# Altium PCB PCB1.PcbDoc
Units mm, origin at the board's own origin, x right, y up, seen from the top; angles counter-clockwise.
Board outline 87.5 x 90 mm, 2 copper layers (Top Layer, Bottom Layer); 23 components, 34 nets, 113 pads, 2 vias.
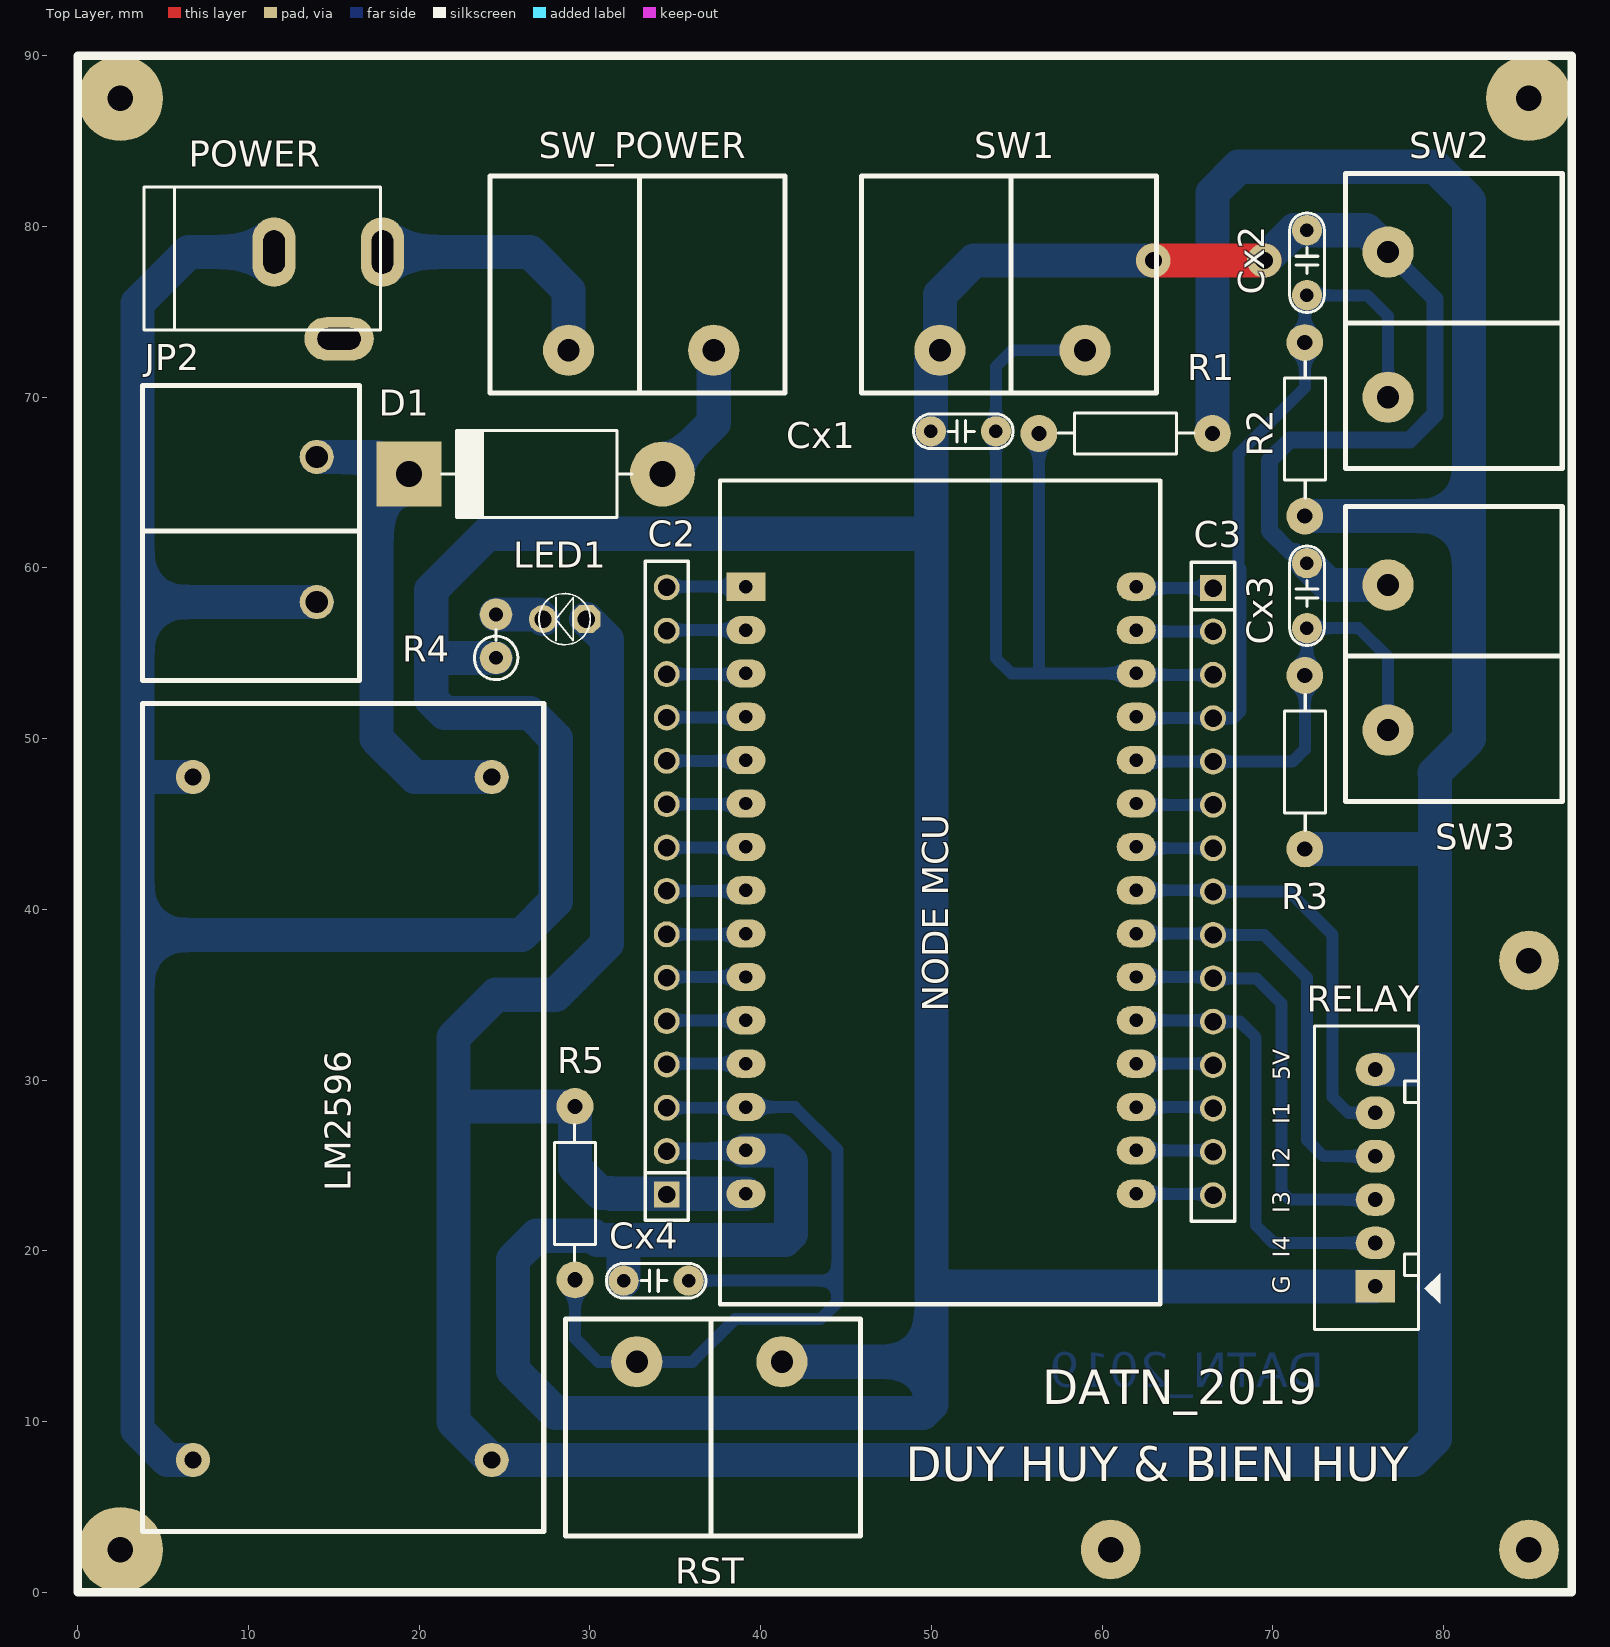
[diagram p0: Top Layer view]
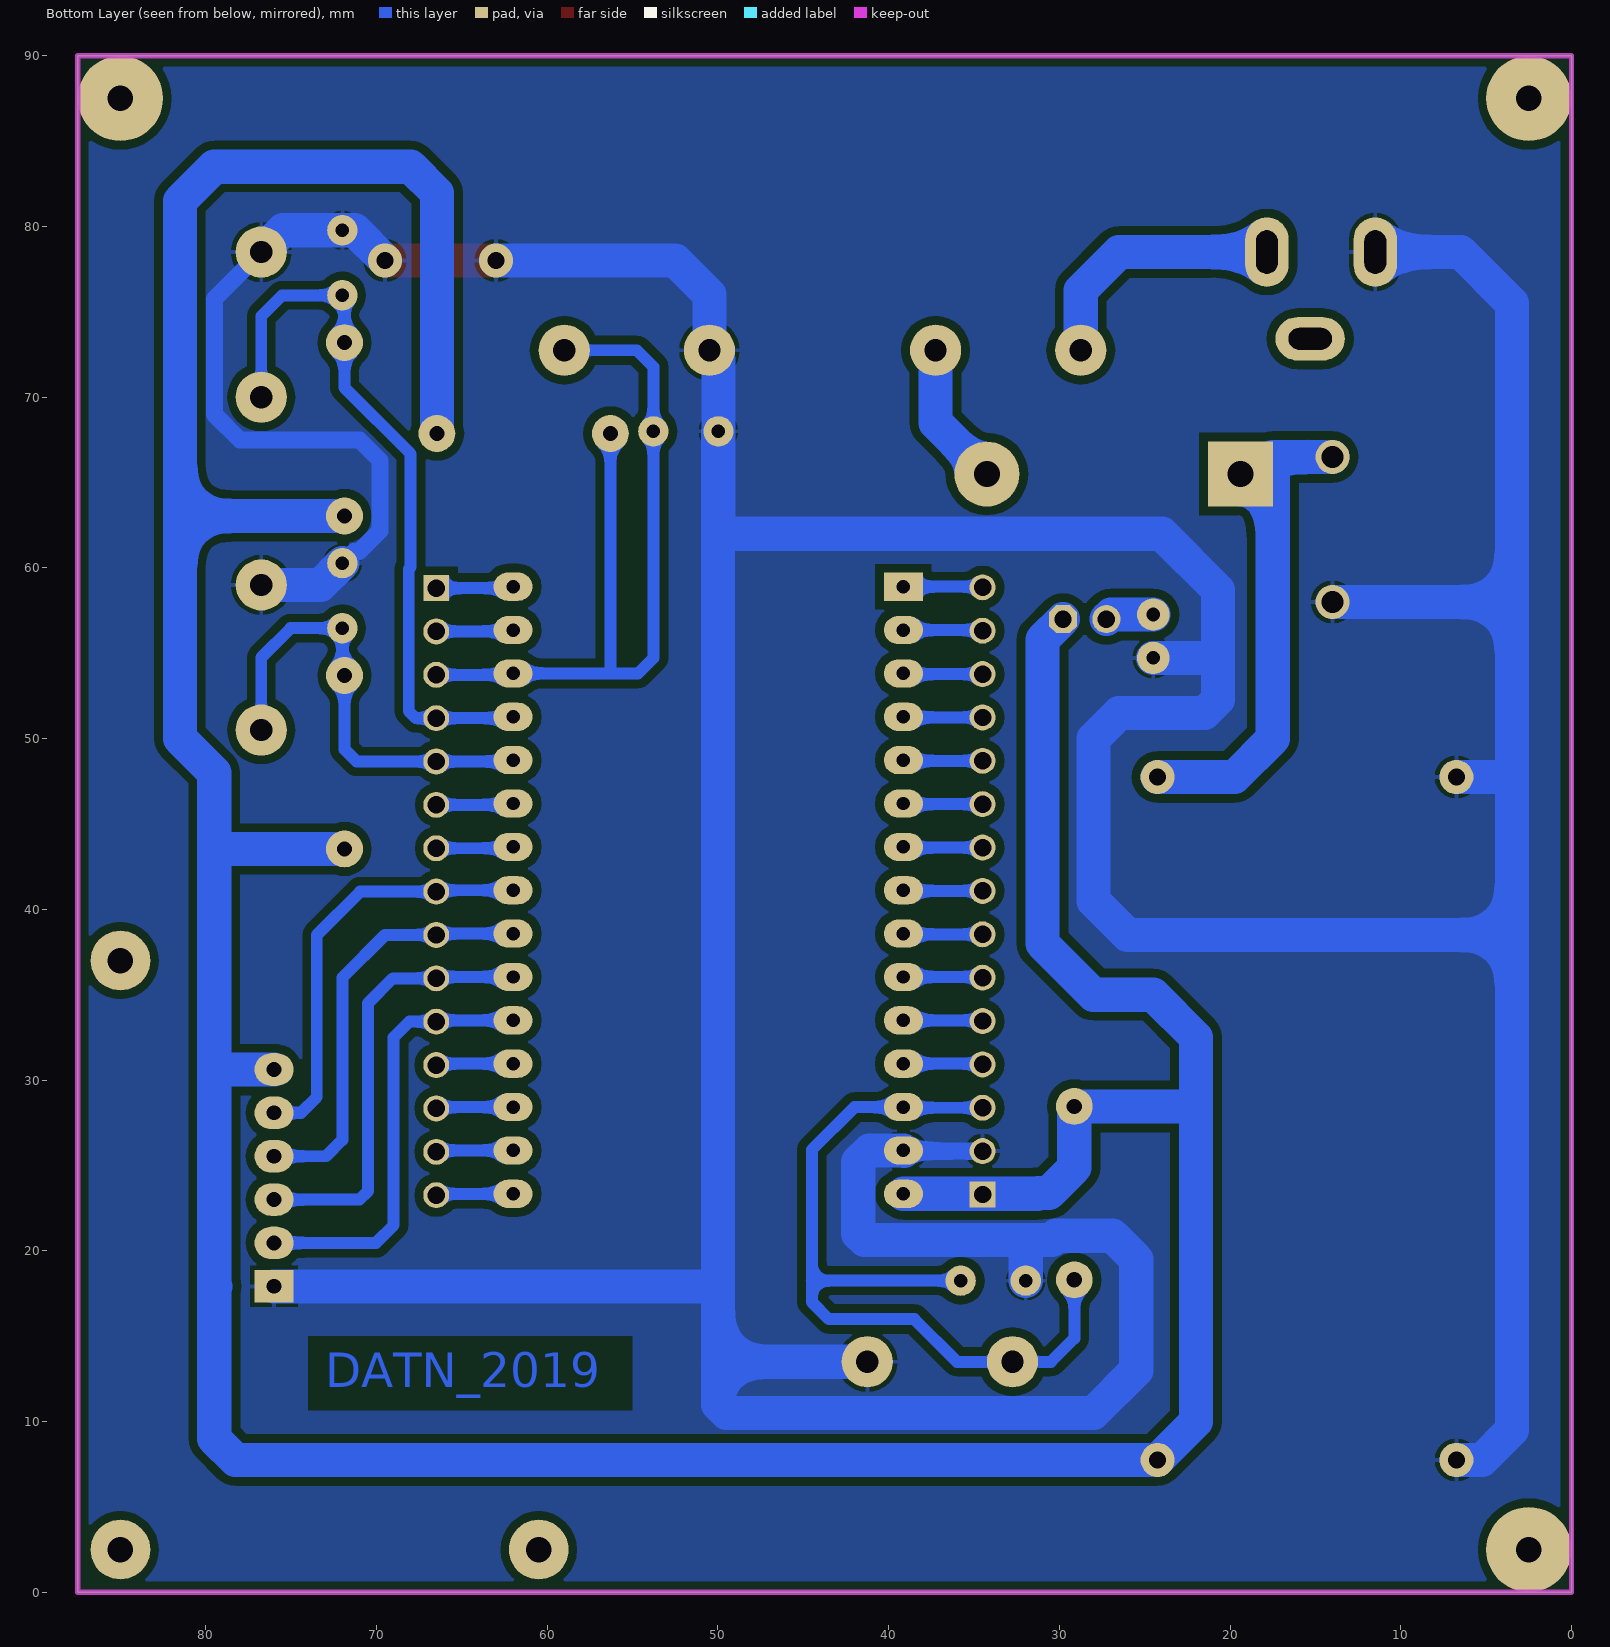
[diagram p1: Bottom Layer view, seen from below]
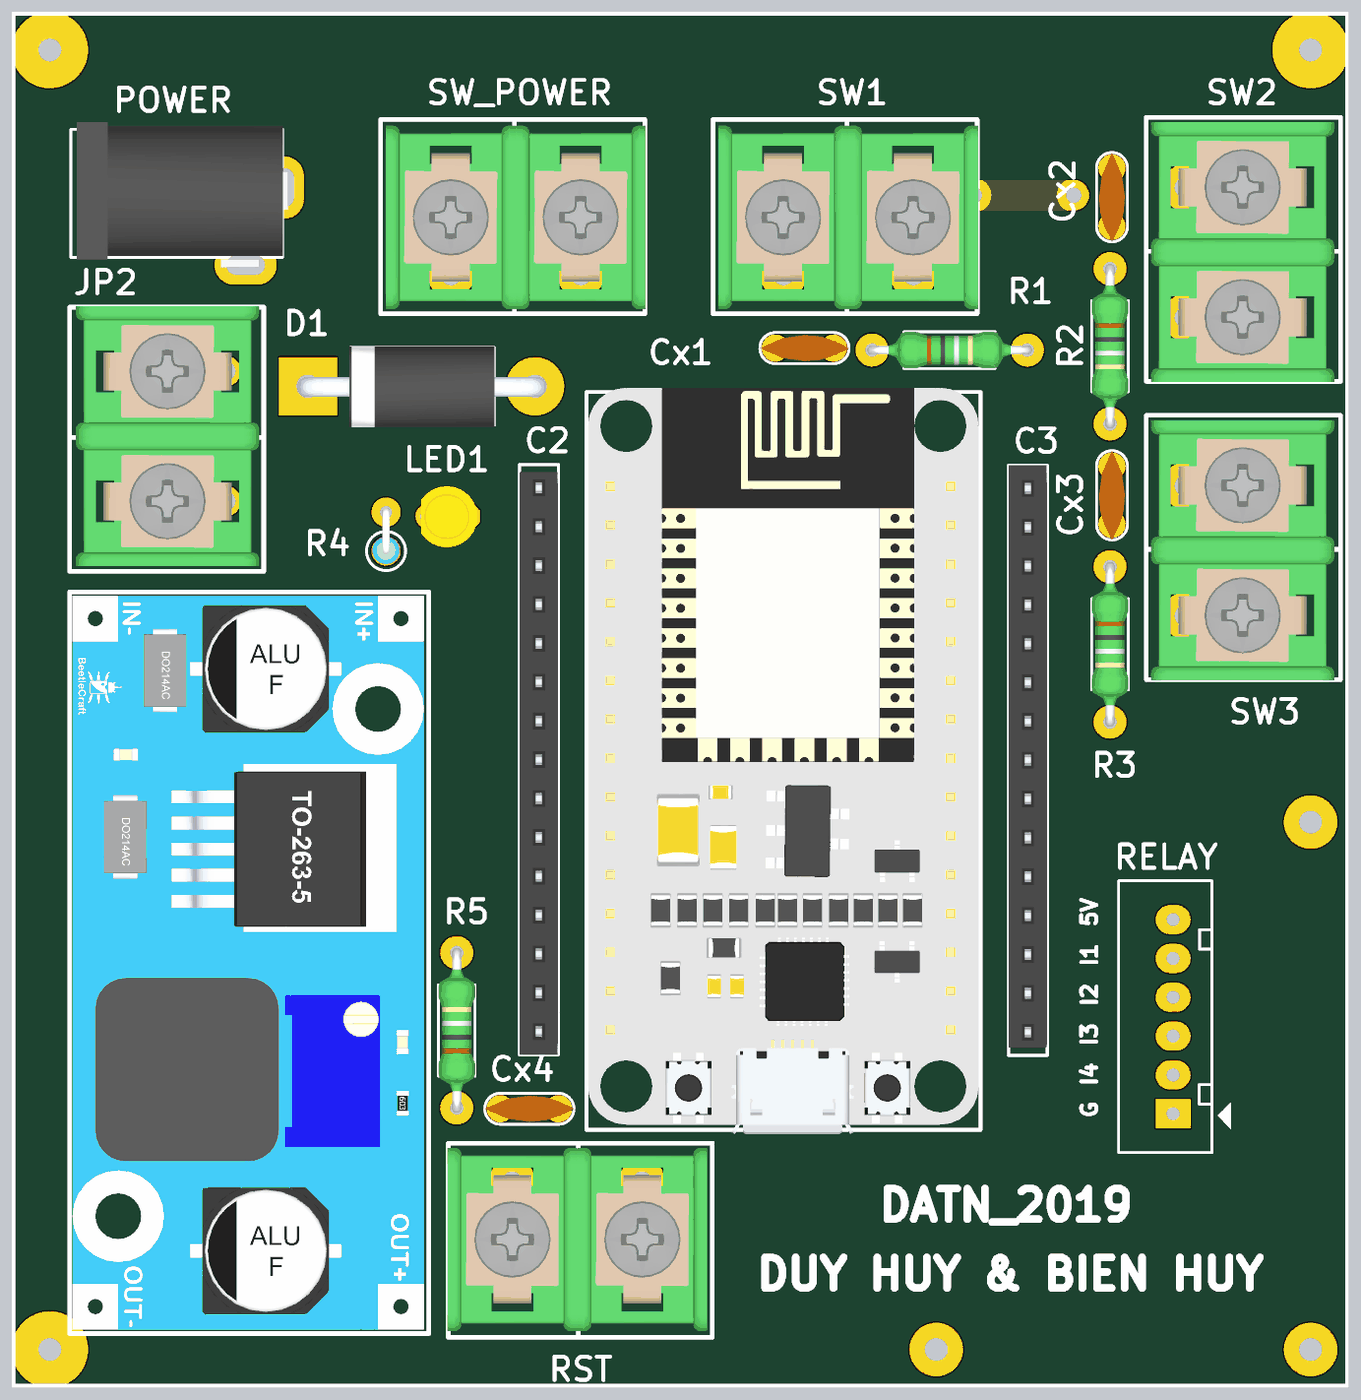
[diagram p2: 3D render of the assembled board from above, using the file's embedded part models]

## Layer stack, top to bottom
Top Solder: solder mask 0.0102, Solder Resist, Dk 3.5
Top Layer: signal copper 0.0356
Dielectric 1: dielectric 0.32, FR-4, Dk 4.8
Bottom Layer: signal copper 0.0356
Bottom Solder: solder mask 0.0102, Solder Resist, Dk 3.5

## Board outline
0,0 87.5,0 87.5,90 0,90

## Design rules (kind name [scope] priority, off if disabled: settings)
Clearance [All] p1: gap=0.5
PolygonConnect [All] p1: connectstyle=Relief reliefconductorwidth=0.254 reliefentries=4 polygonreliefangle="90 Angle" airgapwidth=0.254
RoutingVias [All] p1: holewidth=1 width=2 viastyle="Through Hole" minholewidth=1 minwidth=2 maxholewidth=1 maxwidth=2
SolderMaskExpansion [All] p1: expansion=0.102
Width Net_Signal [InNetClass('Net_Signal')] p1: maxlimit=0.8 minlimit=0.5 preferedwidth=0.7
Width Net_Power [InNetClass('Net_Power')] p2: maxlimit=3 minlimit=1 preferedwidth=2
30 further rules are at their usual default settings.

## Classes and differential pairs
net class Net_Power: 5V 24V GND NetD1_1 NetJDC1_1 NetLED1_2
net class Net_Signal: BUTTON1 BUTTON2 BUTTON3 INT1 INT2 INT3 INT4 NetC2_4 NetC2_5 NetC2_6 NetC2_7 NetC2_8 NetC2_9 NetC2_10 NetC2_11 NetC2_12 NetC2_13 NetC2_14 NetC2_15 NetC3_1 NetC3_2 NetC3_6 NetC3_7 NetC3_12 NetC3_13 NetC3_14 NetC3_15 RST

## Components (designator, comment, footprint, x,y, rotation, side; value= is the part's Value field where it differs from the comment)
C2 "JP15" JP15-C1T 34.5,23.3 r90 top
C3 "JP15" JP15-C1T 66.5,58.82 r270 top
Cx1 "XXpF" CN1.5 51.75,68 r0 top
Cx2 "XXpF" CN1.5 72,78 r270 top
Cx3 "XXpF" CN1.5 72,58.5 r270 top
Cx4 "XXpF" CN1.5 33.75,18.25 r0 top
D1 "Diode" DIO-5A 20.026,65.5 r0 top
JP2 "Header-2P" Header-2P#1 14,62.25 r90 top
LED1 "LED" LED-3MM-YELLOW 29.79,57 r180 top
LM2596 "LM2596" LM2596 15.5,27.75 r270 top (schematic designator IC1)
"NODE MCU" "NodeMCU ESP8266" "NodeMCU ESP8266" 39.14,58.9 r0 top (schematic designator M1)
POWER "Power" DC0 14.675,75.96 r0 top (schematic designator JDC1)
R1 "Res" RES-1/4W 61,68 r180 top
R2 "Res" RES-1/4W 72,68.5 r90 top
R3 "Res" RES-1/4W 72,49 r90 top
R4 "Res" RES-1/8WD 24.5,56 r90 top
R5 "Res" RES-1/4W 29,23 r270 top
RELAY "Modul Relay" Header6 76,17.92 r90 top (schematic designator C1)
RST "Header-2P" Header-2P#2 37,13.5 r180 top (schematic designator JP6)
SW1 "Header-2P" Header-2P#2 54.75,72.75 r0 top (schematic designator JP3)
SW2 "Header-2P" Header-2P#2 76.75,74.25 r270 top (schematic designator JP4)
SW3 "Header-2P" Header-2P#2 76.75,54.75 r270 top (schematic designator JP5)
SW_POWER "Header-2P" Header-2P#2 33,72.75 r0 top (schematic designator JP1)

## Footprints (in the part's own frame and the unit in brackets; to place one, negate y for a bottom-side part, rotate by r counter-clockwise, add the part's x,y. Pads: shape width x height; smd on the part's side, far side on the other; paste and mask are expansions set on the pad)
CN1.5 [mil]
  round 70 hole 31: 1(-70,0) 2(80,0)
  silkscreen extent -110,-40 120,40, body extent -110,-33 120,33, height 235
DC0 [mil] "Jac DC input"
  oval 100x160 hole 50 slot 100 at 90 deg: 1(125,100) 2(-125,100)
  oval 160x100 hole 50 slot 100 at 0 deg: 3(25,-100)
  silkscreen extent -425,-80 120,250, body extent -410,-105 134,269, height 434
DIO-5A [mil] "Diode 5A, W 200mil, L 550mil"
  round 150 hole 60: 1(560,0)
  rect 150x150 hole 60: 2(-25,0)
  silkscreen extent 50,-100 490,100, body extent -52,-106 590,103, height 211
Header6 [mil] "CON6"
  rect 75x90 hole 34: 1(0,0)
  oval 75x90 hole 34: 2(100,0) 3(200,0) 4(300,0) 5(400,0) 6(500,0)
  silkscreen extent -100,-150 600,140
Header-2P#1 [mm]
  round 2 hole 1.3 mask+0.1: 1(-4.25,0) 2(4.25,0)
  silkscreen extent -8.85,-2.5 8.43,10.2, body extent -8.52,-2.2 8.48,9.8, height 12.4
Header-2P#2 [mm]
  round 3 hole 1.3 mask+0.1: 1(-4.25,0) 2(4.25,0)
  silkscreen extent -8.85,-2.5 8.43,10.2, body extent -8.52,-2.2 8.48,9.8, height 12.4
JP15-C1T [mm] "15 row, straight, gold plating"
  rect 1.52x1.52 hole 1.02: 1(0,0)
  round 1.52 hole 1.02: 2(2.54,0) 3(5.08,0) 4(7.62,0) 5(10.16,0) 6(12.7,0) 7(15.24,0) 8(17.78,0) 9(20.32,0) 10(22.86,0) 11(25.4,0) 12(27.94,0) 13(30.48,0) 14(33.02,0) 15(35.56,0)
  silkscreen extent -1.52,-1.27 37.08,1.27, body extent -1.52,-1.25 36.58,1.25, height 8.51
LED-3MM-YELLOW [mil]
  oct 65x65 hole 40: 1(0,0)
  round 65 hole 40: 2(100,0)
  silkscreen extent -9,-59 109,59, body extent -27,-77 117,80, height 181
LM2596 [mm]
  round 2 hole 1: IN+(-20,8.75) IN-(-20,-8.75) OUT+(20,8.75) OUT-(20,-8.75)
  silkscreen extent -24.3,-11.7 24.2,11.8, body extent -24.06,-11.52 23.94,11.48, height 13.09
"NodeMCU ESP8266" [mil] "NodeMCU ESP8266"
  rect 90x65 hole 31: 1(0,0)
  oval 90x65 hole 31: 2(0,-100) 3(0,-200) 4(0,-300) 5(0,-400) 6(0,-500) 7(0,-600) 8(0,-700) 9(0,-800) 10(0,-900) 11(0,-1000) 12(0,-1100) 13(0,-1200) 14(0,-1300) 15(0,-1400) 16(900,-1400) 17(900,-1300) 18(900,-1200) 19(900,-1100) 20(900,-1000) 21(900,-900) 22(900,-800) 23(900,-700) 24(900,-600) 25(900,-500) 26(900,-400) 27(900,-300) 28(900,-200) 29(900,-100) 30(900,0)
  silkscreen extent -60,-1655 955,245, body extent -56,-1666 950,256, height 311
RES-1/4W [mil]
  round 85 hole 35: 1(-215,5) 2(185,5)
  silkscreen extent -173,-42 141,52, body extent -227,-42 197,52, height 95
RES-1/8WD [mm]
  round 1.905 hole 0.8: 1(-1.27,0) 2(1.27,0)
  silkscreen extent -2.55,-1.28 0.38,1.27, body extent -2.16,-0.92 1.55,0.92, height 7.3

## Part data
C2 C3: "WR-PHD 2.54 mm Angled Socket Header"
Cx1 Cx2 Cx3 Cx4: library part CN
D1: "Default Diode"
LED1: "LED Single colour Green and Red"
POWER: library part DCIN, "Jac DC input"
RELAY: library part Header6, "Header IDC, 6 x 1 Pin Vertical 2.54mm Pitch (Non-Boxed, Male)"

## Free pads (board coordinates)
  round 5 hole 1.5: 0(2.5,2.5) 0(2.5,87.5) 0(85,87.5)
  round 3.5 hole 1.5: 1(85,2.5) 2(85,37) 3(60.5,2.5)

## Via types
v1: diameter 2, hole 1, Top Layer to Bottom Layer, 2 vias

## Nets (pads, with @x,y where several pads share a name; then routed paths per layer and width w, separated by ;. In a path a pad name is that pad's centre, name@x,y a point inside that pad or via, vN(x,y) a via of type N, cw(c..) or ccw(c..) an arc to the next point about the centre after c; other vN are vias at no path point)
5V: "NODE MCU.15" C2.1 LED1.1 LM2596.OUT+ R1.1 R2.1 R3.1 R5.1 RELAY.6 | length 258.5
  Bottom Layer w2: LED1.1 31,55.79 31,38 28,35 24.5,35 22,32.5 22,28.5 ; 39.14,23.34 31.271,23.34 31.231,23.38 30.62,23.38 29.127,24.873 R5.1 22.039,28.461 22,28.5 ; R1.1 66.461,81.961 68,83.5 79.5,83.5 81.5,81.5 81.5,63.039 ; R3.1 79.461,43.539 79.5,43.5 ; R2.1 81.5,63.039 ; RELAY.6 79.38,30.62 79.5,30.5 ; 79.42,17.92 79.5,18 ; 79.48,47.98 79.5,48 ; 22,28.5 22,10 LM2596.OUT+ 78.25,7.75 79.5,9 79.5,18 ; 79.5,18 79.5,30.5 ; 79.5,30.5 79.5,43.5 ; 79.5,43.5 79.5,48 ; 79.5,48 81.5,50 81.5,63.039
24V: D1.2 JP2.2 LM2596.IN+ | length 29.6
  Bottom Layer w2: JP2.2 17.5,66.5 D1.2@17.5,65.5 ; D1.2 D1.2@17.5,65.5 ; LM2596.IN+ 19.75,47.75 17.5,50 D1.2@17.5,65.5
BUTTON1: "NODE MCU.28" C3.3 Cx1.2 R1.2 SW1.2 | length 49.7
  Bottom Layer w0.7: 56.301,54 R1.2 ; SW1.2 54.75,72.75 53.782,71.782 Cx1.2 53.782,54.718 54.68,53.82 62,53.82 62.08,53.74 C3.3
BUTTON2: "NODE MCU.27" C3.4 Cx2.2 R2.2 SW2.2 | length 42.4
  Bottom Layer w0.7: 62,51.28 62.08,51.2 C3.4 67.7,51.2 68.11,51.61 68.11,59.932 68,60.042 68,66.683 71.873,70.556 R2.2 71.873,75.841 Cx2.2 75.532,75.968 76.75,74.75 SW2.2
BUTTON3: "NODE MCU.26" C3.5 Cx3.2 R3.2 SW3.2 | length 27.1
  Bottom Layer w0.7: 62,48.74 62.08,48.66 C3.5 71.16,48.66 71.873,49.373 R3.2 72,53.826 Cx3.2 75.032,56.468 76.75,54.75 SW3.2
GND: "NODE MCU.14" C2.2 Cx1.1 Cx2.1 Cx3.1 Cx4.1 JP2.1 LM2596.IN- LM2596.OUT- POWER.2 R4.1 RELAY.1 RST.1 SW1.1 SW2.1 SW3.1 | length 409
  Top Layer w2: v1(63,78) v1(69.5,78)
  Bottom Layer w1: C2.2 39.1,25.84 ; Cx3.1 71.319,60.959 71.012,60.959 69.794,62.178 69.794,66.293 71,67.5 78,67.5 79.5,69 79.5,75.75 SW2.1
  Bottom Layer w2: LM2596.OUT- 5.25,7.75 3.5,9.5 3.5,38.5 ; LM2596.IN- 3.75,47.75 3.5,47.5 ; POWER.2 6.5,78.5 3.5,75.5 3.5,58 ; JP2.1 3.5,58 ; R4.1 20.94,54.73 20.71,54.5 ; Cx4.1 31.972,20.472 32.139,20.639 ; 39.1,25.84 39.14,25.88 41.12,25.88 41.783,25.217 41.783,21 41.422,20.639 32.139,20.639 ; RST.1 50,13.5 ; v1(63,78) 52.5,78 50.5,76 SW1.1 49.972,72.222 Cx1.1 ; v1(69.5,78) 71.278,79.778 Cx2.1 75.472,79.778 SW2.1 ; Cx3.1 73.278,59 SW3.1 ; RELAY.1 50.42,17.92 50,17.5 ; 3.5,38.5 3.5,47.5 ; 3.5,38.5 26,38.5 28,40.5 28,50 26.5,51.5 21.5,51.5 20.71,52.29 20.71,54.5 ; 3.5,47.5 3.5,58 ; 20.71,54.5 20.71,58.71 24,62 49.972,62 Cx1.1 ; 32.139,20.639 30.437,20.639 30.195,20.88 26.88,20.88 25.5,19.5 25.5,13 28,10.5 49.5,10.5 50,11 50,13.5 ; Cx1.1 50,67.972 50,17.5 ; 50,13.5 50,17.5
INT1: "NODE MCU.23" C3.8 RELAY.5 | length 25
  Bottom Layer w0.7: 62,41.12 66.42,41.12 C3.8 70.96,41.04 73.5,38.5 73.5,29 74.42,28.08 RELAY.5
INT2: "NODE MCU.22" C3.9 RELAY.4 | length 25
  Bottom Layer w0.7: 62,38.58 66.42,38.58 C3.9 69.5,38.5 72,36 72,26.5 72.96,25.54 RELAY.4
INT3: "NODE MCU.21" C3.10 RELAY.3 | length 25.8
  Bottom Layer w0.7: 62,36.04 66.42,36.04 C3.10 69.04,35.96 70.5,34.5 70.5,23.5 71,23 RELAY.3
INT4: "NODE MCU.20" C3.11 RELAY.2 | length 25.8
  Bottom Layer w0.7: 62,33.5 66.42,33.5 C3.11 68.08,33.42 69,32.5 69,21.5 70.04,20.46 RELAY.2
NetC2_4: "NODE MCU.12" C2.4 | length 4.7
  Bottom Layer w0.7: C2.4 34.54,30.96 39.14,30.96
NetC2_5: "NODE MCU.11" C2.5 | length 4.7
  Bottom Layer w0.7: C2.5 34.54,33.5 39.14,33.5
NetC2_6: "NODE MCU.10" C2.6 | length 4.7
  Bottom Layer w0.7: C2.6 34.54,36.04 39.14,36.04
NetC2_7: "NODE MCU.9" C2.7 | length 4.7
  Bottom Layer w0.7: C2.7 39.1,38.54 39.14,38.58
NetC2_8: "NODE MCU.8" C2.8 | length 4.7
  Bottom Layer w0.7: C2.8 39.1,41.08 39.14,41.12
NetC2_9: "NODE MCU.7" C2.9 | length 4.7
  Bottom Layer w0.7: C2.9 39.1,43.62 39.14,43.66
NetC2_10: "NODE MCU.6" C2.10 | length 4.7
  Bottom Layer w0.7: C2.10 39.1,46.16 39.14,46.2
NetC2_11: "NODE MCU.5" C2.11 | length 4.7
  Bottom Layer w0.7: C2.11 39.1,48.7 39.14,48.74
NetC2_12: "NODE MCU.4" C2.12 | length 4.7
  Bottom Layer w0.7: C2.12 39.1,51.24 39.14,51.28
NetC2_13: "NODE MCU.3" C2.13 | length 4.7
  Bottom Layer w0.7: C2.13 39.1,53.78 39.14,53.82
NetC2_14: "NODE MCU.2" C2.14 | length 4.7
  Bottom Layer w0.7: C2.14 34.54,56.36 39.14,56.36
NetC2_15: "NODE MCU.1" C2.15 | length 4.7
  Bottom Layer w0.7: C2.15 34.54,58.9 39.14,58.9
NetC3_1: "NODE MCU.30" C3.1 | length 4.5
  Bottom Layer w0.7: 62,58.9 62.08,58.82 C3.1
NetC3_2: "NODE MCU.29" C3.2 | length 4.5
  Bottom Layer w0.7: 62,56.36 62.08,56.28 C3.2
NetC3_6: "NODE MCU.25" C3.6 | length 4.5
  Bottom Layer w0.7: 62,46.2 62.08,46.12 C3.6
NetC3_7: "NODE MCU.24" C3.7 | length 4.5
  Bottom Layer w0.7: 62,43.66 62.08,43.58 C3.7
NetC3_12: "NODE MCU.19" C3.12 | length 4.5
  Bottom Layer w0.7: 62,30.96 66.42,30.96 C3.12
NetC3_13: "NODE MCU.18" C3.13 | length 4.5
  Bottom Layer w0.7: 62,28.42 66.42,28.42 C3.13
NetC3_14: "NODE MCU.17" C3.14 | length 4.5
  Bottom Layer w0.7: 62,25.88 66.42,25.88 C3.14
NetC3_15: "NODE MCU.16" C3.15 | length 4.5
  Bottom Layer w0.7: 62,23.34 66.42,23.34 C3.15
NetD1_1: D1.1 SW_POWER.2 | length 8.5
  Bottom Layer w2: D1.1 37.25,68.5 SW_POWER.2
NetJDC1_1: POWER.1 SW_POWER.1 | length 15.3
  Bottom Layer w2: POWER.1 26.5,78.5 28.75,76.25 SW_POWER.1
NetLED1_2: LED1.2 R4.2 | length 2.9
  Bottom Layer w2: R4.2 26.98,57.27 LED1.2
RST: "NODE MCU.13" C2.3 Cx4.2 R5.2 RST.2 | length 49.5
  Bottom Layer w0.7: R5.2 29.127,14.873 30.5,13.5 RST.2 36,13.5 38.5,16 43.5,16 44.5,17 44.5,18.25 ; C2.3 39.1,28.38 39.14,28.42 42,28.42 44.5,25.92 44.5,18.25 ; Cx4.2 44.5,18.25
pads on no net: POWER.3

## Polygon pours and split planes (outlines as drawn)
GND on Bottom Layer "NONET_L-01_P-001" (solid, remove dead copper, pour order 2): -0.184,89.983 87.316,89.983 87.316,-0.017 -0.184,-0.017

## Keep-outs
Keep-Out Layer:
  the board outline again, w0.3

## Other copper
Bottom Layer:
  text "DATN_2019" at 73,12 h2

## Silkscreen, mask and mechanical layers (free items; w line width, h text height)
Top Overlay:
  the board outline again, w0.5
  text "5V" at 71,30 h1 r90
  text "I1" at 71,27.4 h1 r90
  text "I2" at 71,24.8 h1 r90
  text "I3" at 71,22.2 h1 r90
  text "I4" at 71,19.6 h1 r90
  text "G" at 71,17.5 h1 r90
  text "DATN_2019" at 56.5,11 h2
  text "DUY HUY & BIEN HUY" at 48.5,6.5 h2

## Text inside footprints (layer, text, board x,y; h text height)
JP2: Mechanical 1 "2" at 14.48,66.18 h1 r90; Mechanical 1 "1" at 14.4,57.8 h1 r90
LM2596: Mechanical 1 "OUT-" at 5.9,16.55 h2 r270; Mechanical 1 "OUT+" at 23.3,16.85 h2 r270; Mechanical 1 "IN-" at 5.8,45.75 h2 r270; Mechanical 1 "IN+" at 23.2,45.55 h2 r270
RST: Mechanical 1 "2" at 33.07,13.98 h1 r180; Mechanical 1 "1" at 41.45,13.9 h1 r180
SW1: Mechanical 1 "2" at 58.68,72.27 h1; Mechanical 1 "1" at 50.3,72.35 h1
SW2: Mechanical 1 "2" at 76.27,70.32 h1 r270; Mechanical 1 "1" at 76.35,78.7 h1 r270
SW3: Mechanical 1 "2" at 76.27,50.82 h1 r270; Mechanical 1 "1" at 76.35,59.2 h1 r270
SW_POWER: Mechanical 1 "2" at 36.93,72.27 h1; Mechanical 1 "1" at 28.55,72.35 h1